# Allegro board AVRUSB500.brd
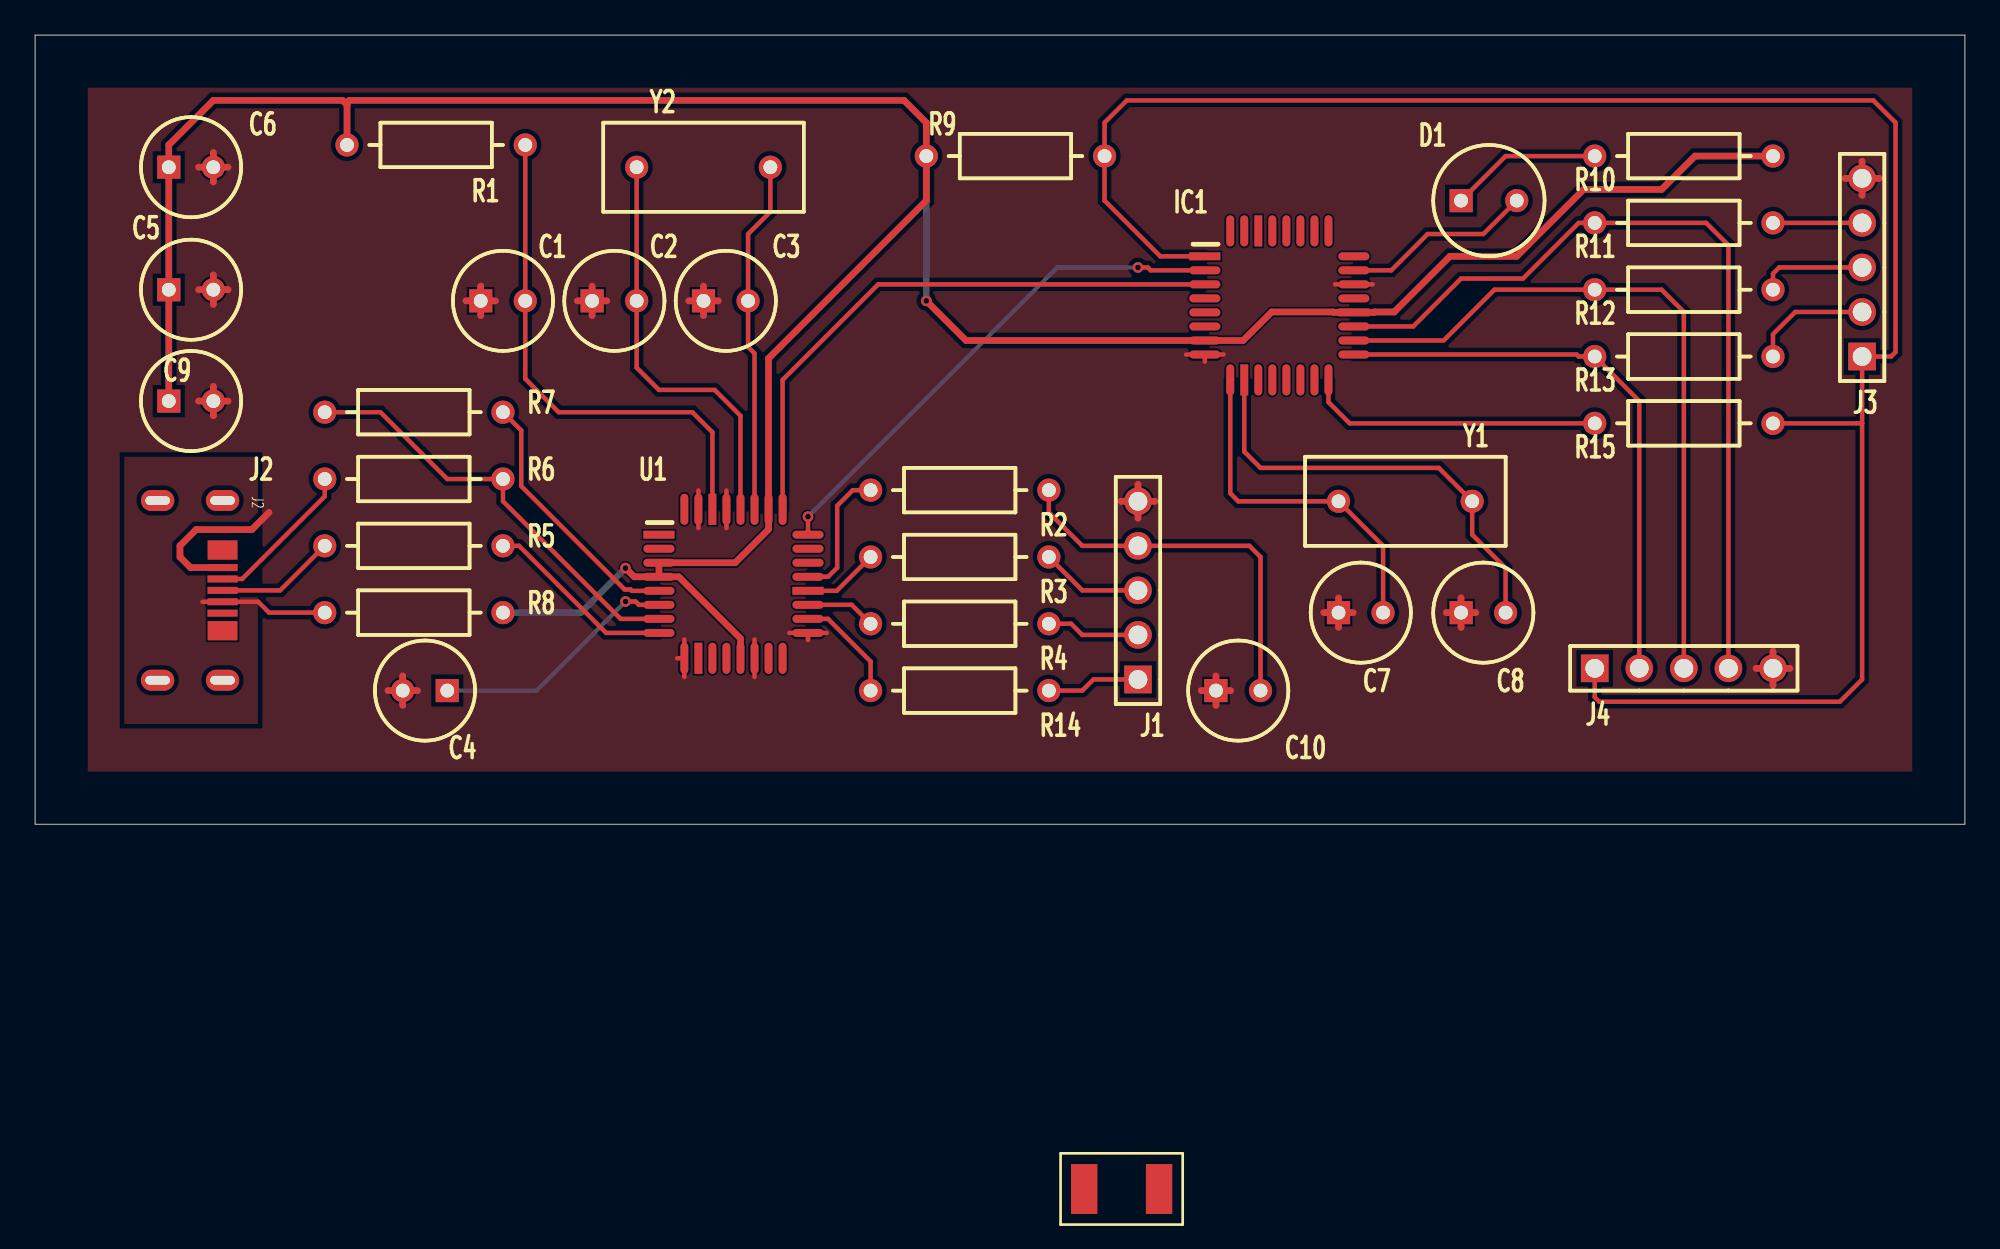
[diagram p0: board, top side]
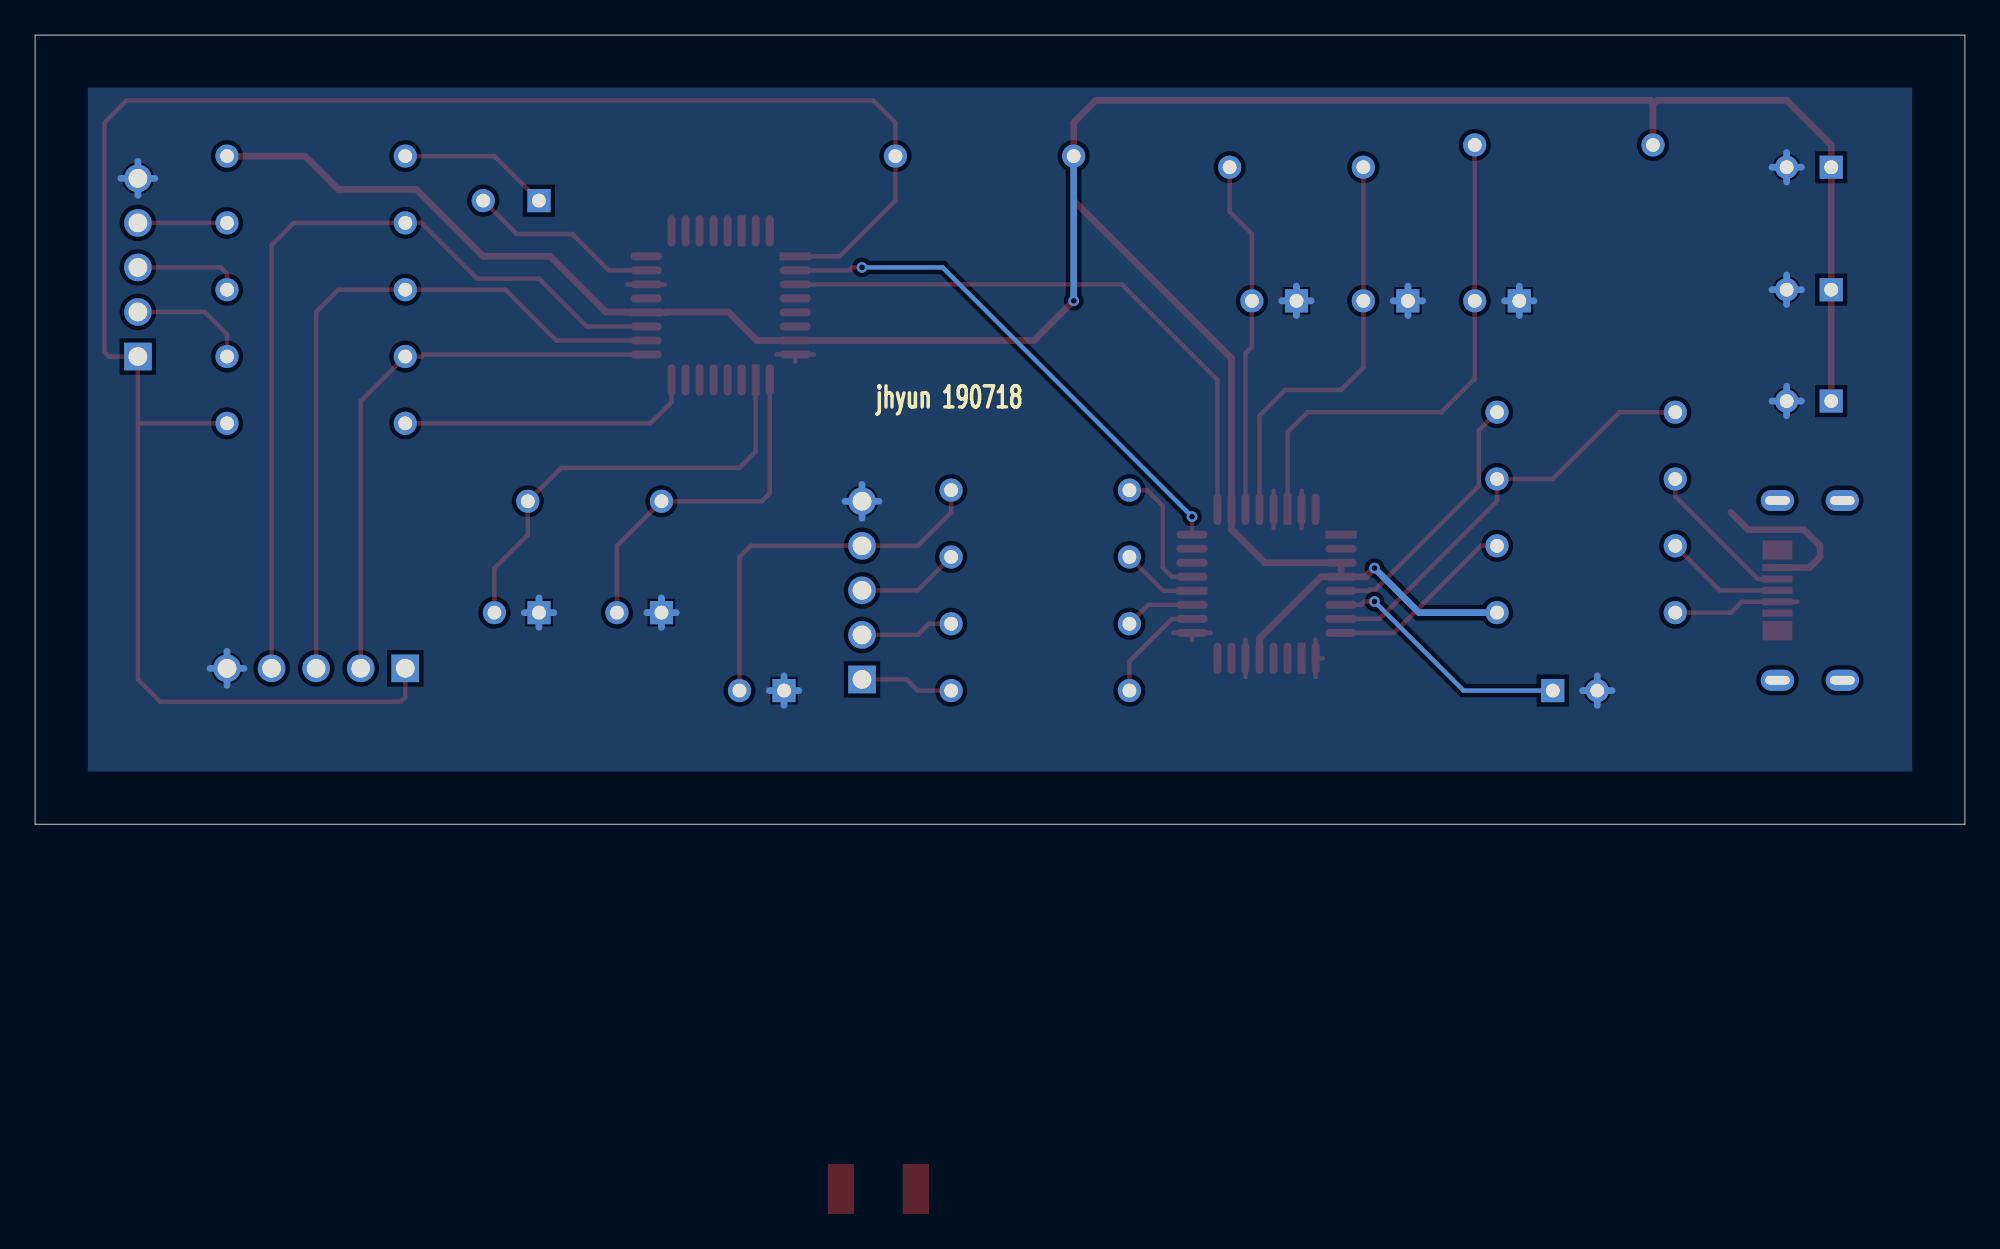
[diagram p1: board, bottom side, seen from below]

Outline 110 x 45 mm; copper layers: TOP, BOTTOM. Coordinates in mm from the lower left corner of the outline.
Outline path: 0,45 110,45 110,0 0,0 0,45

## Design rules (mm)
constraint set DEFAULT: min track width 0.254
net group POWERNETS: nets VCC

## Placement (name value [footprint] x y rotation side)
C1  47nF  [CPCYL1D225LS100031]  25.4 29.84 0 top
C2  27pF  [CPCYL1D225LS100031]  31.75 29.84 0 top
C3  27pF  [CPCYL1D225LS100031]  38.1 29.84 0 top
C4  47nF  [CPCYL1D225LS100031]  23.5 7.62 180 top
C5  100nF  [CPCYL1D225LS100031]  7.62 30.48 0 top
C6  1uF  [CPCYL1D225LS100031]  7.62 37.47 0 top
C7  100nF  [CPCYL1D225LS100031]  74.3 12.06 0 top
C8  100nF  [CPCYL1D225LS100031]  81.28 12.06 0 top
C9  100nF  [CPCYL1D225LS100031]  7.62 24.13 0 top
C10  22nF  [CPCYL1D225LS100031]  67.31 7.62 0 top
D1  LED  [CYLD250LS125031]  81.28 35.56 0 top
IC1  ATmega8  [QUAD80M32WG900]  66.67 32.38 270 top
J1  bbpg_Bitbang  [BLKCON100VHTM1SQSW1005]  62.87 8.26 90 top
J2  USBA  [MICRO_USB]  6.99 13.34 270 top
J3  avrusb500_out  [BLKCON100VHTM1SQSW1005]  104.14 26.67 90 top
J4  firmware_in  [BLKCON100VHTM1SQSW1005]  88.9 8.89 0 top
NOREF  -  []  0 45 0 top
NOREF#2  -  []  110 0 90 top
NOREF#3  -  [unnamed#2]  59.8 -20.8 0 top
R1  470  [AX400X100031]  27.94 38.73 180 top
R2  220  [AX400X100031]  47.62 19.05 0 top
R3  220  [AX400X100031]  47.62 15.24 0 top
R4  220  [AX400X100031]  47.62 11.43 0 top
R5  27  [AX400X100031]  16.51 15.88 0 top
R6  27  [AX400X100031]  16.51 19.68 0 top
R7  1.5k  [AX400X100031]  16.51 23.5 0 top
R8  2.2  [AX400X100031]  16.51 12.06 0 top
R9  10k  [AX400X100031]  50.8 38.1 0 top
R10  470  [AX400X100031]  88.9 38.1 0 top
R11  1k  [AX400X100031]  88.9 34.29 0 top
R12  220  [AX400X100031]  88.9 30.48 0 top
R13  1k  [AX400X100031]  88.9 26.67 0 top
R14  220  [AX400X100031]  47.62 7.62 0 top
R15  220  [AX400X100031]  88.9 22.86 0 top
U1  FT232BM  [QUAD80M32WG900]  35.56 16.51 270 top
Y1  3.6864Mhz  [RAD450X200LS300031]  81.92 18.41 180 top
Y2  6Mhz  [RAD450X200LS300031]  34.29 37.47 0 top

## Library data of the parts
C1-C4 C7 C8 C10 = CAPACITOR NON-POL: alternate symbols: (SML2015)
C5 C9 = CAPACITOR NON-POL: alternate symbols: (SMDCAP)
C6 = CAPACITOR POL: alternate symbols: (SMDCAP)
D1 = LED
IC1 = ATmega8-DIL28_1
J1 J3 J4 = CON5
J2 = CON4_7
R1-R15 = R: alternate symbols: (SML2015)
U1 = FT232BM_2: alternate symbols: (JEDECMS026)
Y1 Y2 = ZTA

## Footprints (pads in the part's own frame, mm; a bottom-side part is the same pattern mirrored in y, then rotated)
AX400X100031
  round 1.321 hole 0.787: 1(0,0) 2(10.16,0)
BLKCON100VHTM1SQSW1005
  rect 1.575x1.575 hole 1.067: 1(0,0)
  round 1.575 hole 1.067: 2(2.54,0) 3(5.08,0) 4(7.62,0) 5(10.16,0)
CPCYL1D225LS100031
  rect 1.321x1.321 hole 0.787: 1(0,0)
  round 1.321 hole 0.787: 2(2.54,0)
CYLD250LS125031
  rect 1.321x1.321 hole 0.787: 1(0,0)
  round 1.321 hole 0.787: 2(3.175,0)
MICRO_USB
  oval 1.2x1.9 hole 0.5x1.4: (-5.125,3.7) (-5.125,0) (5.125,3.7) (5.125,0)
  rect 1.1x1.7 smd: (-2.3,3.7) (2.3,3.7)
  rect 0.4x1.72 smd: 1(-1.3,3.7) 2(-0.65,3.7) 3(0,3.7) 4(0.65,3.7) 5(1.3,3.7)
QUAD80M32WG900
  rect 0.457x1.778 smd: 1(0,0) 20(3.2,8.496)
  oval 0.457x1.778 smd: 2(0.8,0) 3(1.6,0) 4(2.4,0) 5(3.2,0) 6(4,0) 7(4.801,0) 8(5.601,0) 17(5.601,8.496) 18(4.801,8.496) 19(4,8.496) 21(2.4,8.496) 22(1.6,8.496) 23(0.8,8.496) 24(0,8.496)
  oval 1.778x0.457 smd: 9(7.048,1.448) 11(7.048,3.048) 12(7.048,3.848) 13(7.048,4.648) 14(7.048,5.448) 15(7.048,6.248) 16(7.048,7.048) 25(-1.448,7.048) 26(-1.448,6.248) 27(-1.448,5.448) 28(-1.448,4.648) 29(-1.448,3.848) 31(-1.448,2.248) 32(-1.448,1.448)
  rect 1.778x0.457 smd: 10(7.048,2.248) 30(-1.448,3.048)
RAD450X200LS300031
  round 1.321 hole 0.787: 1(0,0) 2(7.62,0)
unnamed#2
  rect 1.499x2.845 smd: 1(0,0) 2(4.267,0)

## Nets
+5V: J2.4 R8.1
GND: C1.1 C2.1 C3.1 C4.2 C5.2 C6.2 C7.1 C8.1 C9.2 C10.1 IC1.8 IC1.22 J1.5 J2.1 J3.5 J4.5 U1.9 U1.14 U1.17 U1.29 U1.31
VCC: C5.1 C6.1 C9.1 IC1.7(VCC) IC1.20 R1.2 R8.2 R9.1 R10.2 U1.3 U1.4 U1.13 U1.26
BMISO: J1.3 R3.2
BMOSI: J1.2 R4.2
BRESET: J1.1 R14.2
BSCK: C10.2 J1.4 R2.2
D+: J2.2 R6.1
D-: J2.3 R5.1
F_MISO: IC1.18 J4.3 R12.1
F_MOSI: IC1.17 J4.2 R13.1
F_SCK: IC1.19 J4.4 R11.1
MISO: J3.3 R12.2
MOSI: J3.2 R13.2
RESET: IC1.1 J3.1 J4.1 R9.2 R15.2
RXD: IC1.2 U1.24
SCK: J3.4 R11.2
TXD: IC1.3 U1.25
N02483: R6.2 R7.1 U1.7
N02615: R5.2 U1.8
N03527: C4.1 U1.6
N06839: R2.1 U1.21
N06967: R3.1 U1.20
N07033: R4.1 U1.19
N07247: R14.1 U1.18
N11951: R7.2 U1.5
N15182: C7.2 IC1.9 Y1.2
N15289: C8.2 IC1.10 Y1.1
N19734: D1.2(CATHODE) IC1.23
N20572: D1.1 R10.1
N22544: IC1.16 R15.1
N41098: C3.2 U1.27 Y2.2
N41106: C2.2 U1.28(XTOUT) Y2.1
N49165: C1.2 R1.1 U1.30

Pads without a net: IC1 4 5 6 11 12 13 14 15 21 24 25 26 27 28 29 30 31 32; J2 5; NOREF#3 1 2; U1 1 2 10 11 12 15 16 22 23 32

## Via types
v1: diameter 0.61, hole 0.33, TOP to BOTTOM, 5 vias

## Routing (per net, layer and track width the routed paths; a pad name or vN(x,y) marks a point on that pad's centre or on a via; arc(x,y) is an arc through that point)
+5V: length 7.3
  TOP w0.254: J2.4 12.71,12.69 13.34,12.06 R8.1 ; J2.4 10.69,12.71 ; J2.4 9.54,12.69
GND: length 115.7
  TOP w0.254: 41.01,10.53 U1.14 41.01,8.39 ; 39.41,16.89 U1.29 39.41,19.02 ; 37.81,16.89 U1.31 37.81,19.02 ; 37.01,8.39 U1.9 ; U1.9 36.6,9.46 ; U1.9 37.01,10.53 ; IC1.8 67.74,26.78 ; IC1.8 66.67,26.38 ; IC1.8 65.61,26.78 ; 74.1,30.79 76.24,30.79 ; 44.06,10.91 45.12,10.91 ; 44.06,10.91 42.99,10.91 ; 44.06,10.91 44.06,10.5
  TOP w0.381: 62.87,17.45 J1.5 ; J1.5 62.87,19.38 ; J1.5 63.83,18.41 ; J1.5 61.9,18.41 ; J3.5 105.11,36.83 ; J3.5 104.14,35.86 ; J3.5 103.17,36.83 ; J3.5 104.14,37.8 ; 99.06,7.92 J4.5 ; J4.5 99.06,9.86 ; J4.5 98.09,8.89 ; J4.5 100.03,8.89 ; 10.16,29.64 C5.2 ; C5.2 11,30.48 ; C5.2 9.32,30.48 ; C5.2 10.16,31.32 ; C8.1 82.12,12.06 ; C8.1 81.28,12.9 ; C8.1 81.28,11.23 ; C8.1 80.44,12.06 ; C7.1 74.3,12.9 ; C7.1 75.13,12.06 ; C7.1 73.46,12.06 ; C7.1 74.3,11.23 ; 66.47,7.62 C10.1 ; C10.1 67.31,8.46 ; C10.1 68.15,7.62 ; C10.1 67.31,6.78 ; C6.2 10.16,38.3 ; C6.2 11,37.47 ; C6.2 9.32,37.47 ; C6.2 10.16,36.63 ; C9.2 11,24.13 ; C9.2 9.32,24.13 ; C9.2 10.16,24.97 ; C9.2 10.16,23.29 ; C2.1 32.59,29.84 ; C2.1 30.91,29.84 ; C2.1 31.75,30.68 ; C2.1 31.75,29.01 ; C1.1 25.4,30.68 ; C1.1 24.56,29.84 ; C1.1 26.24,29.84 ; C1.1 25.4,29.01 ; C3.1 38.1,30.68 ; C3.1 38.1,29.01 ; C3.1 38.94,29.84 ; C3.1 37.26,29.84 ; 20.95,6.78 C4.2 ; C4.2 20.95,8.46 ; C4.2 20.12,7.62 ; C4.2 21.79,7.62
  TOP w0.382: 10.83,14.63 J2.1 8.86,14.63 8.26,15.24 8.26,15.88 9.18,16.8 12.36,16.8 13.34,17.78
  BOTTOM w0.381: C1.1 26.24,29.84 ; C1.1 25.4,29.01 ; C1.1 24.56,29.84 ; C1.1 25.4,30.68 ; 9.32,24.13 C9.2 ; C9.2 10.16,24.97 ; C9.2 11,24.13 ; C9.2 10.16,23.29 ; C6.2 10.16,38.3 ; C6.2 10.16,36.63 ; C6.2 9.32,37.47 ; C6.2 11,37.47 ; C5.2 10.16,31.32 ; C5.2 10.16,29.64 ; C5.2 9.32,30.48 ; C5.2 11,30.48 ; 74.3,11.23 C7.1 ; C7.1 75.13,12.06 ; C7.1 73.46,12.06 ; C7.1 74.3,12.9 ; 37.26,29.84 C3.1 ; C3.1 38.1,30.68 ; C3.1 38.94,29.84 ; C3.1 38.1,29.01 ; 99.06,7.92 J4.5 ; J4.5 98.09,8.89 ; J4.5 100.03,8.89 ; J4.5 99.06,9.86 ; 66.47,7.62 C10.1 ; C10.1 68.15,7.62 ; C10.1 67.31,6.78 ; C10.1 67.31,8.46 ; J1.5 63.83,18.41 ; J1.5 61.9,18.41 ; J1.5 62.87,17.45 ; J1.5 62.87,19.38 ; 103.17,36.83 J3.5 ; J3.5 104.14,37.8 ; J3.5 105.11,36.83 ; J3.5 104.14,35.86 ; C4.2 20.95,8.46 ; C4.2 20.95,6.78 ; C4.2 20.12,7.62 ; C4.2 21.79,7.62 ; C2.1 31.75,30.68 ; C2.1 31.75,29.01 ; C2.1 32.59,29.84 ; C2.1 30.91,29.84 ; 81.28,11.23 C8.1 ; C8.1 82.12,12.06 ; C8.1 81.28,12.9 ; C8.1 80.44,12.06
VCC: length 175.9
  TOP w0.382: R10.2 94.61,38.1 92.71,36.2 88.27,36.2 84.45,32.38 80.64,32.38 77.47,29.21 76.34,29.21 76.31,29.18 74.03,29.18 74,29.21 70.48,29.21 68.86,27.58 IC1.7 53.06,27.58 v1(50.8,29.84) ; U1.4 34.15,14.11 v1(33.66,14.61) ; U1.4 U1.3 39.9,14.91 41.81,16.82 U1.26 41.81,26.57 50.8,35.56 R9.1 50.8,40.01 49.53,41.27 17.91,41.27 17.78,41.15 17.78,41.02 ; U1.4 36.69,14.11 40.21,10.59 U1.13 ; 17.78,41.02 17.53,41.27 10.16,41.27 7.62,38.73 C6.1 C5.1 C9.1 ; 17.78,41.02 R1.2
  BOTTOM w0.382: v1(33.66,14.61) 31.11,12.06 R8.2 ; R9.1 v1(50.8,29.84)
BMISO: length 5.9
  TOP w0.254: R3.2 59.69,13.34 J1.3
BMOSI: length 5.3
  TOP w0.254: J1.2 59.69,10.79 59.05,11.43 R4.2
BRESET: length 5.3
  TOP w0.254: R14.2 59.69,7.62 60.33,8.26 J1.1
BSCK: length 22
  TOP w0.254: C10.2 69.85,15.24 69.22,15.88 J1.4 59.69,15.88 57.78,17.78 R2.2
D+: length 8.8
  TOP w0.254: R6.1 16.51,18.7 11.8,13.98 10.69,13.98
D-: length 6.9
  TOP w0.254: R5.1 13.97,13.34 J2.3
F_MISO: length 40.9
  TOP w0.254: 75.17,27.58 80.29,27.58 83.19,30.48 R12.1 92.71,30.48 93.98,29.21 J4.3
F_MOSI: length 32.6
  TOP w0.254: J4.2 91.44,24.13 R13.1 87.99,26.67 87.87,26.78 75.17,26.78
F_SCK: length 48.5
  TOP w0.254: J4.4 96.52,33.02 95.25,34.29 R11.1 87.99,34.29 84.81,31.11 81.28,31.11 78.55,28.39 75.17,28.39
MISO: length 6.1
  TOP w0.254: J3.3 99.42,31.75 99.06,31.39 R12.2
MOSI: length 6.9
  TOP w0.254: J3.2 100.33,29.21 99.06,27.94 R13.2
RESET: length 113.7
  TOP w0.254: 104.14,22.86 J3.1 105.79,26.67 106.05,26.92 106.05,40.01 104.78,41.27 62.23,41.27 60.96,40.01 R9.2 60.96,35.56 64.14,32.38 IC1.1 ; 104.14,22.86 104.14,8.26 102.87,6.99 89.15,6.99 88.9,7.24 J4.1 ; 104.14,22.86 R15.2
RXD: length 29.6
  TOP w0.254: v1(62.87,31.75) 63.42,31.75 63.59,31.59 IC1.2 ; v1(44.06,17.54) U1.24
  BOTTOM w0.254: v1(62.87,31.75) 58.27,31.75 v1(44.06,17.54)
SCK: length 5.1
  TOP w0.254: R11.2 J3.4
TXD: length 33.7
  TOP w0.254: U1.25 42.61,25.34 48.06,30.79 IC1.3
N02483: length 24.7
  TOP w0.254: R7.1 19.68,23.5 23.5,19.68 R6.2 26.67,18.41 33.38,11.71 35.56,11.71
N02615: length 10.9
  TOP w0.254: R5.2 27.58,15.88 32.55,10.91 35.56,10.91
N03527: length 14.2
  TOP w0.254: v1(33.66,12.7) 34.23,12.7 34.42,12.51 U1.6
  BOTTOM w0.254: v1(33.66,12.7) 28.57,7.62 C4.1
N06839: length 7.7
  TOP w0.254: U1.21 45.2,14.11 45.72,14.63 45.72,18.16 46.61,19.05 R2.1
N06967: length 4.4
  TOP w0.254: U1.20 45.7,13.31 R3.1
N07033: length 4
  TOP w0.254: R4.1 46.55,12.51 U1.19
N07247: length 6.2
  TOP w0.254: R14.1 47.62,9.28 45.2,11.71 44.06,11.71
N11951: length 15
  TOP w0.254: R7.2 27.71,22.45 27.71,19.28 33.6,13.39 33.94,13.39 34.02,13.31 U1.5
N15182: length 20.2
  TOP w0.254: C7.2 76.83,15.88 Y1.2 68.58,18.41 68.12,18.87 68.12,25.34
N15289: length 25.4
  TOP w0.254: C8.2 83.82,14.61 81.92,16.51 Y1.1 80.01,20.32 69.85,20.32 68.92,21.25 IC1.10
N19734: length 10.9
  TOP w0.254: D1.2 82.55,33.66 79.38,33.66 77.31,31.59 75.17,31.59
N20572: length 8.7
  TOP w0.254: R10.1 83.82,38.1 D1.1
N22544: length 16.9
  TOP w0.254: R15.1 74.93,22.86 73.72,24.07 IC1.16
N41098: length 20.2
  TOP w0.254: U1.27 41.01,26.85 40.64,27.22 C3.2 40.64,33.66 41.91,34.92 Y2.2
N41106: length 23.8
  TOP w0.254: U1.28 40.21,23.29 38.73,24.77 35.56,24.77 34.29,26.04 C2.2 Y2.1
N49165: length 29.7
  TOP w0.254: R1.1 C1.2 27.94,25.4 29.84,23.5 37.47,23.5 38.61,22.35 U1.30

## Copper pours and planes (outline as drawn; the poured copper is in the pictures)
+5V on TOP: 5.08,20.95 5.08,5.71 12.7,5.71 12.7,20.95 ; 2 cut-outs
GND on TOP: 3,3 3,42 107,42 107,3 ; 2 cut-outs
GND on BOTTOM: 3,3 3,42 107,42 107,3

## Text on the board
Ref Des/Silkscreen Bottom: jhyun 190718
NCLEGEND-1-2: FIGURE | SIZE | 0.33 | 0.7869 | 1.0671 | 1.4x0.5001 | DRILL CHART: TOP to BOTTOM | ALL UNITS ARE IN MILLIMETERS | PLATED | QTY | 5 | 56 | 15 | 4
